# Altium PCB atWork_Power.PcbDoc
Units mm, origin at the board's own origin, x right, y up, seen from the top; angles counter-clockwise.
Board outline 233 x 88 mm, 2 copper layers (Top Layer, Bottom Layer); 115 components, 56 nets, 441 pads, 84 vias.
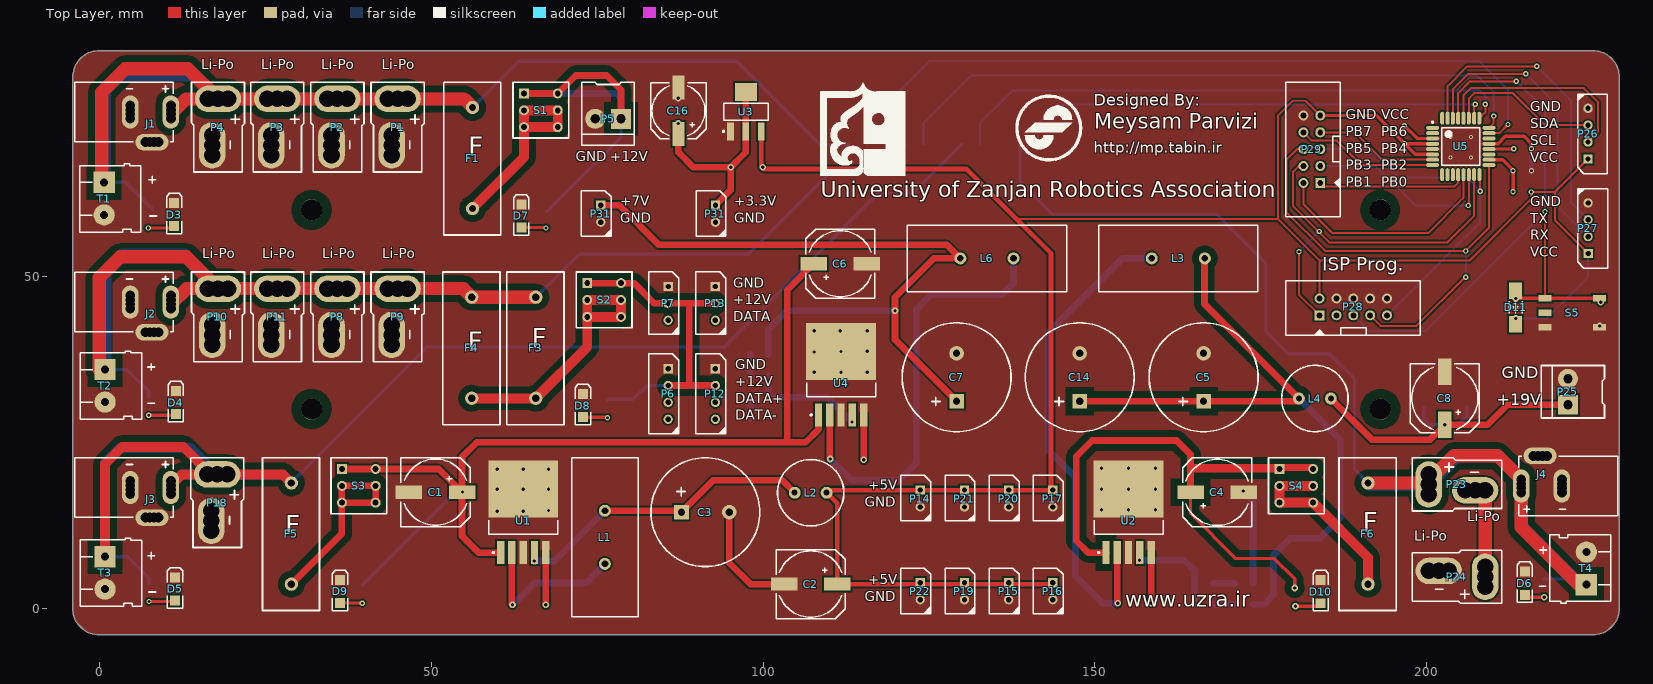
[diagram p0: Top Layer view]
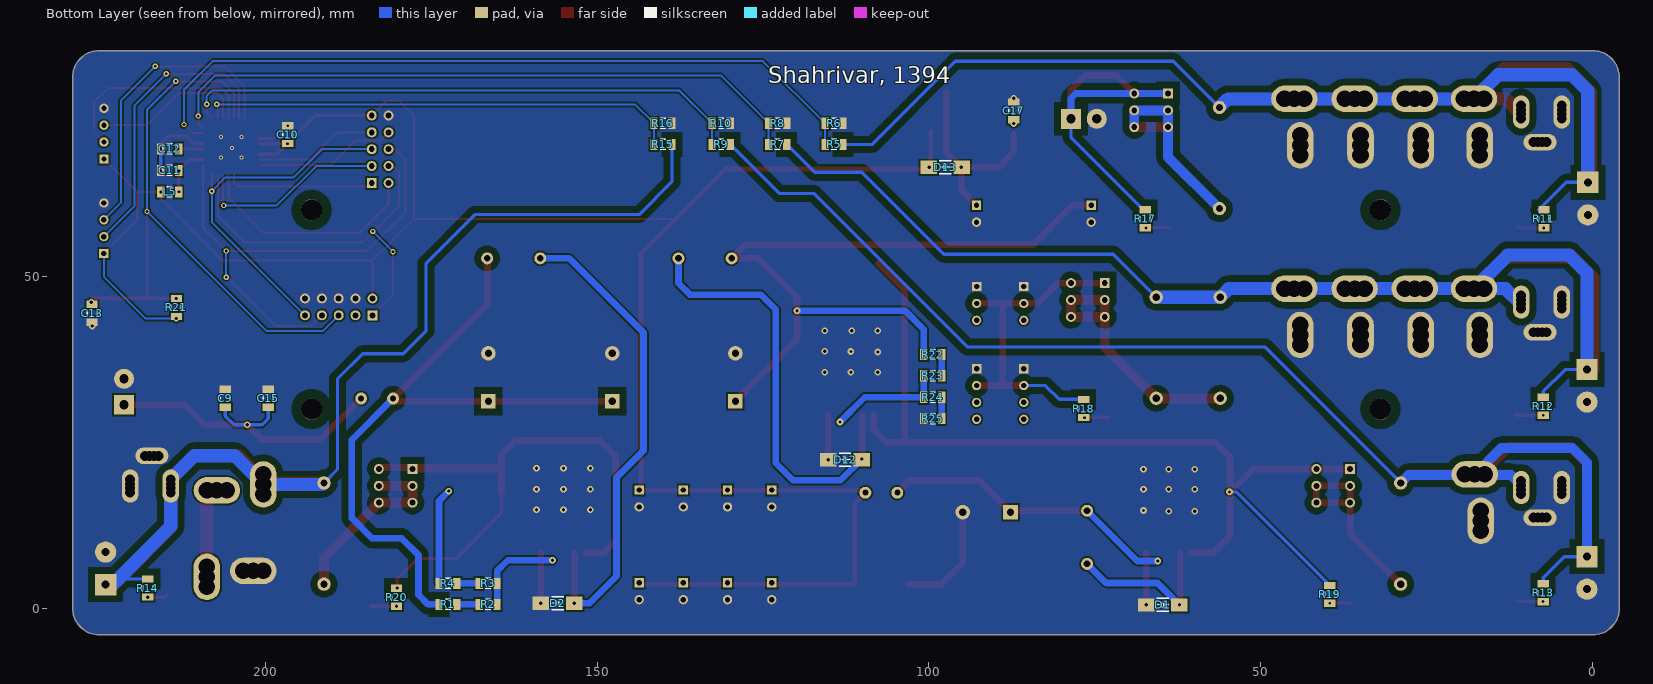
[diagram p1: Bottom Layer view, seen from below]

## Layer stack, top to bottom
Top Solder: solder mask 0.0102, Solder Resist, Dk 3.5
Top Layer: signal copper 0.0356
Dielectric 1: dielectric 0.32, FR-4, Dk 4.8
Bottom Layer: signal copper 0.0356
Bottom Solder: solder mask 0.0102, Solder Resist, Dk 3.5

## Board outline
-4,0 ccw(c0,0) 0,-4 225,-4 ccw(c225,0) 229,0 229,80 ccw(c225,80) 225,84 0.012,84 ccw(c0.012,80) -3.988,80 -4,80

## Design rules (kind name [scope] priority, off if disabled: settings)
Clearance Clearance_1 [InNet('BATT1') vs InNet('GND')] p1: gap=1
Clearance Clearance_2 [InNet('BATT2') vs InNet('GND')] p2: gap=1
Clearance Clearance_3 [InNet('BATT3') vs InNet('GND')] p3: gap=1
Clearance Clearance_4 [InNet('BATT_PC') vs InNet('GND')] p4: gap=1
Clearance Clearance_5 [InNet('MOTORS_POWER') vs InNet('GND')] p5: gap=1
Clearance Clearance_6 [InNet('DYNAMIXEL_POWER') vs InNet('GND')] p6: gap=1
Clearance Clearance_7 [InNet('PC_POWER') vs InNet('GND')] p7: gap=1
Clearance Clearance_8 [InNet('19V_PC') vs InNet('GND')] p8: gap=1
Clearance Clearance_9 [InNet('NetF1_2') vs InNet('GND')] p9: gap=1
Clearance Clearance_10 [InNet('NetF3_2') vs InNet('GND')] p10: gap=1
Clearance Clearance_12 [InNet('NetF5_2') vs InNet('GND')] p11: gap=1
Clearance Clearance_11 [InNet('NetF6_2') vs InNet('GND')] p12: gap=1
Clearance [All] p13: gap=0.254
PolygonConnect [All] p1: connectstyle=Direct reliefconductorwidth=0.254 reliefentries=4 polygonreliefangle="90 Angle" airgapwidth=0.254
RoutingVias [All] p1: holewidth=0.711 width=1.27 viastyle="Through Hole" minholewidth=0.711 minwidth=1.27 maxholewidth=0.711 maxwidth=1.27
SolderMaskExpansion [All] p1: expansion=0.102
Width [All] p1: maxlimit=2.54 minlimit=0.254 preferedwidth=0.4 minimp=50.000000 maximp=50.000000 favimp=50.000000
30 further rules are at their usual default settings.

## Classes and differential pairs
component class atWork_Power: C1 C2 C3 C4 C5 C6 C7 C8 C9 C14 C15 C16 C17 D1 D2 D12 D13 F1 F3 F4 F5 F6 J1 J2 J3 J4 L1 L2 L3 L4 L6 P1 P2 P3 P4 P5 P6 P7 P8 P9 P10 P11 P12 P13 P14 P15 P16 P17 P18 P19 P20 P21 P22 P23 P24 P25 P31 R1 R2 R3 R4 R22 R23 R24 R25 S1 S2 S3 S4 T1 T2 T3 T4 U1 U2 U4 U5
component class atWork_Power2: C10 C11 C12 C13 D3 D4 D5 D6 D7 D8 D9 D10 D11 L5 P26 P27 P28 P29 R5 R6 R7 R8 R9 R10 R11 R12 R13 R14 R15 R16 R17 R18 R19 R20 R21 S5 U5

## Components (designator, comment, footprint, x,y, rotation, side; value= is the part's Value field where it differs from the comment)
C1 "Cap Pol1" CAP-SMD2 50.661,17.478 r0 top
C2 "Cap Pol1" CAP-SMD2 107.176,3.638 r0 top
C3 "Cap Pol1" CAP2 91.313,14.478 r0 top
C4 "Cap Pol1" CAP-SMD2 168.402,17.478 r180 top
C5 "Cap Pol1" CAP2 166.37,34.798 r90 top
C6 "Cap Pol1" CAP-SMD2 111.633,51.915 r180 top
C7 "Cap Pol1" CAP2 129.159,34.798 r90 top
C8 "Cap Pol1" CAP-SMD2 202.692,31.623 r270 top
C9 "Cap" C1206 205.994,31.623 r270 bottom
C10 "Cap" C1206 196.608,71.35 r270 bottom
C11 "Cap" C1206 214.388,65.952 r180 bottom
C12 "Cap" C1206 214.388,69.191 r180 bottom
C13 "Cap" C1206 226.072,44.426 r90 bottom
C14 "Cap Pol1" CAP2 147.701,34.798 r90 top
C15 "Cap" C1206 199.517,31.623 r270 bottom
C16 "Cap Pol1" CAP-SMD1 87.249,74.93 r270 top
C17 "Cap" C1206 87.249,74.93 r270 bottom
D1 "1N5822" DIODE-SMD 64.77,0.508 r180 bottom
D2 "1N5822" DIODE-SMD 155.956,0.762 r180 bottom
D3 "LED2" 3.2X1.6X1.1 11.291,59.305 r90 top
D4 "LED2" 3.2X1.6X1.1 11.545,30.984 r90 top
D5 "LED2" 3.2X1.6X1.1 11.418,2.917 r90 top
D6 "LED2" 3.2X1.6X1.1 214.757,3.782 r90 top
D7 "LED2" 3.2X1.6X1.1 63.595,59.105 r90 top
D8 "LED2" 3.2X1.6X1.1 72.866,30.53 r90 top
D9 "LED2" 3.2X1.6X1.1 36.29,2.531 r90 top
D10 "LED2" 3.2X1.6X1.1 184.003,2.507 r90 top
D11 "Diode 1N4007" DIODE-SMD 213.372,45.315 r270 top
D12 "1N5822" DIODE-SMD 112.649,22.352 r180 bottom
D13 "Diode 1N4007" DIODE-SMD 97.536,66.421 r0 bottom
F1 "Fuse 1" FUSE 56.249,75.448 r270 top
F3 "Fuse 1" FUSE 65.774,46.873 r270 top
F4 "Fuse 1" FUSE 56.122,46.873 r270 top
F5 "Fuse 1" FUSE 28.944,18.874 r270 top
F6 "Fuse 1" FUSE 191.135,18.874 r270 top
J1 "PWR2.5" PWR2.5 -3.712,74.759 r0 top
J2 "PWR2.5" PWR2.5 -3.712,46.125 r0 top
J3 "PWR2.5" PWR2.5 -3.712,18.185 r0 top
J4 "PWR2.5" PWR2.5 228.727,18.415 r180 top
L1 "Inductor" IND2 76.188,10.685 r90 top
L2 "Inductor" IND1 107.176,17.404 r0 top
L3 "Inductor" IND2 162.56,52.705 r0 top
L4 "Inductor" IND1 183.134,31.598 r0 top
L5 "Inductor" C1206 214.388,62.714 r0 bottom
L6 "Inductor" IND2 133.731,52.705 r180 top
P1 "XT Power" XT 44.946,76.732 r270 top
P2 "XT Power" XT 35.886,76.732 r270 top
P3 "XT Power" XT 26.827,76.732 r270 top
P4 "XT Power" XT 17.895,76.732 r270 top
P5 "Motors Power" POWER2PIN 78.613,73.732 r180 top
P6 "Dynamixel 4 Pin Power" XH4PIN 85.713,36.092 r90 top
P7 "Dynamixel 3 Pin Power" XH3PIN 85.713,48.463 r90 top
P8 "XT Power" XT 35.886,48.157 r270 top
P9 "XT Power" XT 44.946,48.157 r270 top
P10 "XT Power" XT 17.895,48.157 r270 top
P11 "XT Power" XT 26.827,48.157 r270 top
P12 "Dynamixel 4 Pin Power" XH4PIN 92.825,36.092 r90 top
P13 "Dynamixel 3 Pin Power" XH3PIN 92.825,48.463 r90 top
P14 "Digital Power" XH2PIN 123.686,17.804 r90 top
P15 "Digital Power" XH2PIN 137.001,3.834 r90 top
P16 "Digital Power" XH2PIN 143.659,3.834 r90 top
P17 "Digital Power" XH2PIN 143.659,17.804 r90 top
P18 "XT Power" XT 17.768,20.158 r270 top
P19 "Digital Power" XH2PIN 130.343,3.834 r90 top
P20 "Digital Power" XH2PIN 137.001,17.804 r90 top
P21 "Digital Power" XH2PIN 130.343,17.804 r90 top
P22 "Digital Power" XH2PIN 123.686,3.834 r90 top
P23 "XT Power" XT 200.279,18.658 r0 top
P24 "XT Power" XT 208.779,4.734 r180 top
P25 "PC Power" POWER2PIN 221.253,30.66 r90 top
P26 "I2C" XH4PIN 224.282,67.691 r270 top
P27 "UART" XH4PIN 224.294,53.443 r270 top
P28 "Programmer" BOX2X5 188.923,44.137 r0 top
P29 "Box 5X2" BOX2X5 183.943,69.155 r90 top
P31 "3.3V Power" XH2PIN 92.837,60.706 r90 top
P31 "Encoder Power" XH2PIN 75.565,60.706 r90 top
R1 "Res1" C1206 172.466,0.577 r180 bottom
R2 "Res1" C1206 166.412,0.577 r180 bottom
R3 "Res1" C1206 166.412,3.741 r0 bottom
R4 "Res1" C1206 172.466,3.741 r180 bottom
R5 "Res1" C1206 114.288,69.874 r0 bottom
R6 "Res1" C1206 114.288,73.049 r180 bottom
R7 "Res1" C1206 122.797,69.874 r0 bottom
R8 "Res1" C1206 122.797,73.049 r180 bottom
R9 "Res1" C1206 131.306,69.874 r0 bottom
R10 "Res1" C1206 131.306,73.049 r180 bottom
R11 "Res1" C1206 7.366,58.674 r90 bottom
R12 "Res1" C1206 7.481,30.415 r90 bottom
R13 "Res1" C1206 7.481,2.348 r90 bottom
R14 "Res1" C1206 217.678,3.048 r90 bottom
R15 "Res1" C1206 140.069,69.874 r0 bottom
R16 "Res1" C1206 140.069,73.049 r180 bottom
R17 "Res1" C1206 67.425,58.663 r90 bottom
R18 "Res1" C1206 76.696,30.088 r90 bottom
R19 "Res1" C1206 39.612,2.089 r90 bottom
R20 "Res1" C1206 180.213,1.651 r90 bottom
R21 "Res1" C1206 213.372,45.315 r90 bottom
R22 "Res1" C1206 99.441,38.227 r180 bottom
R23 "Res1" C1206 99.441,35.01 r0 bottom
R24 "Res1" C1206 99.441,31.792 r180 bottom
R25 "Res1" C1206 99.441,28.575 r180 bottom
S1 "Switch 6 Pin" SW6PIN 63.996,77.556 r0 top
S2 "Switch 6 Pin" SW6PIN 73.521,48.981 r0 top
S3 "Switch 6 Pin" SW6PIN 36.564,20.982 r0 top
S4 "Switch 6 Pin" SW6PIN 177.8,20.982 r0 top
S5 "SW-PB" PUSH1 217.817,46.712 r0 top
T1 "Terminal 2" TERMINAL2PIN 0.75,64.159 r270 top
T2 "Terminal 2" TERMINAL2PIN 0.877,35.965 r270 top
T3 "Terminal 2" TERMINAL2PIN 0.877,7.771 r270 top
T4 "Terminal 2" TERMINAL2PIN 224.028,3.556 r90 top
U1 "LM2576S-5.0" TS5B_M 63.869,14.435 r90 top
U2 "LM2576S-ADJ" TS5B_M 155.067,14.435 r90 top
U3 "LM1117MP-3.3" MP04A_M 97.409,74.803 r90 top
U4 "LM2576S-ADJ" TS5B_M 111.76,35.179 r90 top
U5 "ATmega8A-AU" 32A_M 205.117,69.572 r0 top

## Footprints (in the part's own frame and the unit in brackets; to place one, negate y for a bottom-side part, rotate by r counter-clockwise, add the part's x,y. Pads: shape width x height; smd on the part's side, far side on the other; paste and mask are expansions set on the pad)
3.2X1.6X1.1 [mm] "SMT LED; 2 Flat Leads"
  rect 1.5x1.5 smd: 1(-1.75,0) 2(1.75,0)
  silkscreen extent -2.9,-1.15 3.2,1.15
32A_M [mm] "Thin QFP, 32-Leads, Body 7x7mm, Pitch 0.8mm, IPC Low Density"
  oval 1.95x0.6 smd: 1(-4.25,2.8) 2(-4.25,2) 3(-4.25,1.2) 4(-4.25,0.4) 5(-4.25,-0.4) 6(-4.25,-1.2) 7(-4.25,-2) 8(-4.25,-2.8) 17(4.25,-2.8) 18(4.25,-2) 19(4.25,-1.2) 20(4.25,-0.4) 21(4.25,0.4) 22(4.25,1.2) 23(4.25,2) 24(4.25,2.8)
  oval 0.6x1.95 smd: 9(-2.8,-4.25) 10(-2,-4.25) 11(-1.2,-4.25) 12(-0.4,-4.25) 13(0.4,-4.25) 14(1.2,-4.25) 15(2,-4.25) 16(2.8,-4.25) 25(2.8,4.25) 26(2,4.25) 27(1.2,4.25) 28(0.4,4.25) 29(-0.4,4.25) 30(-1.2,4.25) 31(-2,4.25) 32(-2.8,4.25)
  silkscreen extent -4.37,-2.85 2.85,3.77, body extent -3.5,-3.5 3.5,3.5, height 1.2
BOX2X5 [mm] "Box Header; 5x2 Position"
  rect 1.5x1.5 hole 0.9: 1(-5.08,0)
  round 1.5 hole 0.9: 2(-5.08,2.54) 3(-2.54,0) 4(-2.54,2.54) 5(0,0) 6(0,2.54) 7(2.54,0) 8(2.54,2.54) 9(5.08,0) 10(5.08,2.54)
  silkscreen extent -10.18,-3 10.12,5.2, body extent -10.18,-3 10.12,5.2, height 9
C1206 [mm] "Chip Capacitor, Body 3.2x1.6mm, IPC High Density"
  rect 1.1x1.7 smd: 1(-1.35,0) 2(1.35,0)
  silkscreen extent -0.4,-0.75 0.4,0.75, body extent -1.7,-0.9 1.7,0.9, height 1.3
CAP2 [mm] "1000uF, 50V, Electrolyte Capacitor; 2 Leads"
  rect 2.2x2.2 hole 1.1: 1(-3.6,0)
  round 2.2 hole 1.1: 2(3.6,0)
  silkscreen extent -8.2,-8.2 8.2,8.2
CAP-SMD1 [mm] "SMD Electrolyte Capacitor; 2 Leads; 100uF; 25V"
  rect 3.6x1.8 smd: 1(3.5,0) 2(-3.5,0)
  silkscreen extent -4.2,-4.2 4.2,4.2
CAP-SMD2 [mm] "SMD Electrolyte Capacitor; 2 Leads; 100uF; 50V"
  rect 4x2 smd: 1(4,0) 2(-4,0)
  silkscreen extent -5.2,-5.21 5.2,5.21
DIODE-SMD [mm] "1N5822; SS34 Schottkey Diode"
  rect 2.5x2 smd: 1(-2.5,0) 2(2.5,0)
  silkscreen extent -0.9,-0.99 0.9,0.99
FUSE [mm] "Fuse"
  round 2 hole 1.1: 1(0,0) 2(15.24,0)
  silkscreen extent -3.78,-4.36 19.22,4.24
IND1 [mm] "330uH 2A Inductor"
  round 1.8 hole 0.9: 1(-2.4,0) 2(2.4,0)
  silkscreen extent -5,-5 5,5
IND2 [mm] "100uH 5A Inductor"
  round 1.8 hole 1: 1(-4,0) 2(4,0)
  silkscreen extent -12,-5 12,5
MP04A_M [mm] "SOT223, 4-Leads, Body 6.5x3.5mm, Pitch 2.3mm, Lead Span 7mm, IPC Low Density"
  rect 2.7x1 smd: 1(-2.95,2.3) 2(-2.95,0) 3(-2.95,-2.3)
  rect 2.7x3.3 smd: 4(2.95,0)
  silkscreen extent -3.07,-3.35 1.3,3.47, body extent -1.85,-3.35 1.85,3.35, height 1.8
POWER2PIN [mm]
  rect 3x3 hole 1.4: 1(0,0)
  round 3 hole 1.4: 2(3.9,0)
  silkscreen extent -2,-5.5 5.9,4
PUSH1 [mm] "SMD Push Button; Arduino Uno Reset Button"
  rect 2x1 smd: 0(0,-2.2) 1(0,0) 1(8.2,0) 2(0,-4.4) 2(8.2,-4.4)
PWR2.5 [mm] "DC Power Jack, 2.5mm, KLD Series, PCB Mount"
  round 1.5 hole 1.5: 1(14.503,-1) 1(14.503,-0.33) 1(14.503,0.33) 1(14.503,1) 2(8.389,-1) 2(8.389,-0.33) 2(8.389,0.33) 2(8.389,1) 3(10.659,-4.547) 3(11.989,-4.547) 3(12.659,-4.547)
  oval 2.5x5 all layers, no hole: 1(14.503,0) 2(8.389,0)
  oval 1x1.5 hole 1.5: 3(11.328,-4.547)
  oval 5x2.5 all layers, no hole: 3(11.659,-4.547)
  silkscreen extent 0,-4.5 14.88,4.5
SW6PIN [mm] "On/Off Switch 6 Pin"
  rect 1.5x1.5 hole 0.9: 1(0,0)
  round 1.5 hole 0.9: 2(0,-2.54) 3(0,-5.08) 4(5.08,0) 5(5.08,-2.54) 6(5.08,-5.08)
  silkscreen extent -1.65,-6.72 6.75,1.68
TERMINAL2PIN [mm]
  rect 3.2x3.2 hole 1.2: 1(0,0)
  round 3.2 hole 1.2: 2(4.9,0)
  silkscreen extent -2.77,-3.7 7.5,5.5, body extent -2.5,-3.7 7.5,5.5, height 12.4
TS5B_M [mm] "D2-PAK, 6-Leads, Body 8.6x10.2mm, Pitch 1.7mm, Lead Span 14.1mm, IPC Low Density"
  rect 3.5x1.1 smd: 1(-6.05,3.4) 2(-6.05,1.7) 3(-6.05,0) 4(-6.05,-1.7) 5(-6.05,-3.4)
  rect 8.6x10.5 smd: 6(3.5,0)
  silkscreen extent -6.17,-5.2 -1.2,5.2, body extent -3.3,-5.2 6.1,5.2, height 4.65
XH2PIN [mm] "XH 2 Pin Connector"
  rect 1.4x1.4 hole 0.8: 1(0,0)
  round 1.4 hole 0.8: 2(-2.54,0)
  silkscreen extent -4.65,-1.57 2.22,2.93
XH3PIN [mm] "XH 3 Pin Connector"
  rect 1.4x1.4 hole 0.8: 1(0,0)
  round 1.4 hole 0.8: 2(-2.54,0) 3(-5.08,0)
  silkscreen extent -7.16,-1.57 2.22,2.93
XH4PIN [mm] "XH 4 Pin Connector"
  rect 1.4x1.4 hole 0.8: 1(0,0)
  round 1.4 hole 0.8: 2(-2.54,0) 3(-5.08,0) 4(-7.62,0)
  silkscreen extent -9.78,-1.57 2.22,2.93
XT [mm] "Li-Po Battery Connector; XT Power Connector"
  round 2.5 hole 2.5: 1(0,1.5) 1(0,0) 1(0,-1.5) 2(5.485,-0.89) 2(6.985,-0.89) 2(8.485,-0.89)
  oval 4x7 all layers, no hole: 1(0,0)
  oval 7x4 all layers, no hole: 2(6.985,-0.89)
  silkscreen extent -2.5,-4 11,4

## Part data
C1 C2 C3 C4 C5 C6 C7 C8 C14 C16: "Polarized Capacitor (Radial)"
C9 C10 C11 C12 C13 C15 C17: "Capacitor"
D1 D2 D12: library part Diode, "Default Diode"
D3 D4 D5 D6 D7 D8 D9 D10: "Typical RED, GREEN, YELLOW, AMBER GaAs LED"
D11 D13: "1 Amp General Purpose Rectifier"
F1 F3 F4 F5 F6: "Fuse"
J1 J2 J3 J4: "Low Voltage Power Supply Connector"
P1 P2 P3 P4 P5 P8 P9 P10 P11 P14 P15 P16 P17 P18 P19 P20 P21 P22 P23 P24 P25 P31 P31: library part "Header 2", "Header, 2-Pin"
P6 P12 P26 P27: library part "Header 4", "Header, 4-Pin"
P7 P13: library part "Header 3", "Header, 3-Pin"
P28: library part "Box 5X2", "Box, 5-Pin, Dual row"
P29: "Box, 5-Pin, Dual row"
R1 R2 R3 R4 R5 R6 R7 R8 R9 R10 R11 R12 R13 R14 R15 R16 R17 R18 R19 R20 R21 R22 R23 R24 R25: "Resistor"
S5: "Switch"
T1 T2 T3 T4: "Terminal, 2 pin"
U1 U2 U4: "SIMPLE SWITCHER® 3A Step-Down Voltage Regulator, 5-pin TO-263"
U3: "800mA Low-Dropout Linear Regulator, 4-pin SOT-223"
U5: "8-bit AVR Microcontroller, 8KB Flash, 512 Bytes EEPROM, 1KB SRAM, 32-pin TQFP, Industrial Grade (-40°C to 85°C)"

## Free pads (board coordinates)
  round 3.2 hole 3.2: 0(32,30) 0(32,60) 0(193,30) 0(193,60)

## Via types
v1: diameter 1, hole 0.5, Top Layer to Bottom Layer, 51 vias
v2: diameter 0.8, hole 0.4, Top Layer to Bottom Layer, 28 vias
v3: diameter 0.6, hole 0.3, Top Layer to Bottom Layer, 5 vias

## Nets (pads, with @x,y where several pads share a name; then routed paths per layer and width w, separated by ;. In a path a pad name is that pad's centre, name@x,y a point inside that pad or via, vN(x,y) a via of type N, cw(c..) or ccw(c..) an arc to the next point about the centre after c; other vN are vias at no path point)
3V3: C16.1 C17.2 D13.1 P31.1@92.837,60.706 U3.2 U3.4 | length 30.5
  Top Layer w1: C16.1 87.249,68.707 89.535,66.421 v1(95.123,66.421) ; P31.1@92.837,60.706 95.123,62.992 v1(95.123,66.421) ; U3.4 U3.2 97.409,68.707 v1(95.123,66.421)
  other v1: 87.249,73.025
5V: C2.1 C10.2 D11.2 D13.2 L2.2 L5.2 P14.1 P15.1 P16.1 P17.1 P19.1 P20.1 P21.1 P22.1 P26.1 P27.1 P28.2 P29.9 R21.1 U3.3 U5.4 U5.6 | length 348.4
  Top Layer w0.3: 138.176,58.674 177.546,58.674 ; P28.2 183.843,52.377 ; P29.9 181.724,76.454 179.832,76.454 177.546,74.168 177.546,58.674 ; P26.1 219.305,62.714 ; P27.1 219.305,58.432 219.305,62.714 ; 177.546,58.674 183.843,52.377 ; 183.843,52.377 206.428,52.377 215.738,61.687 v2(215.738,62.714) 219.305,62.714
  Top Layer w0.5: P29.9 192.374,74.235 v2(196.636,69.972) ; U5.6 198.236,68.372 v2(196.636,69.972) ; U5.4 v2(196.636,69.972)
  Top Layer w0.7: U3.3 99.709,66.661 v1(99.949,66.421) 100.203,66.167 130.683,66.167 138.176,58.674 143.383,53.467 143.383,18.08 P17.1 P20.1 P21.1 P14.1 109.976,17.804 L2.2 111.176,15.804 C2.1 143.463,3.638 P16.1
  Bottom Layer w0.3: v1(213.372,43.664) 218.035,43.664 224.294,49.923 P27.1
7V_ENCODER: C7.1 L6.2 P31.1@75.565,60.706 R22.1 | length 113.3
  Top Layer w1: P31.1@75.565,60.706 78.359,60.706 84.328,54.737 127.699,54.737 L6.2 125.73,52.705 119.888,46.863 v1(119.888,44.831) 119.888,40.469 C7.1
  Bottom Layer w1: R22.1 100.791,41.99 103.632,44.831 v1(119.888,44.831)
19V_PC: C5.1 C14.1 L3.2 L4.1 R1.1 | length 102.4
  Top Layer w1: C14.1 C5.1 L4.1@180.334,31.198 ; L3.2@166.497,52.832 166.497,45.835 L4.1
  Bottom Layer w1: R1.1 175.456,0.577 176.911,2.032 176.911,8.001 179.451,10.541 183.896,10.541 186.944,13.589 186.944,25.388 L4.1
ADC0: R5.2 R6.1 U5.23 | length 114.1
  Top Layer w0.3: U5.23 210.927,71.572 v2(212.229,72.874)
  Bottom Layer w0.3: R5.2 R6.1 125.012,82.423 207.899,82.423 212.229,78.093 v2(212.229,72.874)
ADC1: R7.2 R8.1 U5.24 | length 98.8
  Top Layer w0.3: U5.24 210.07,73.075 v2(210.07,74.144)
  Bottom Layer w0.3: R7.2 R8.1 131.362,80.264 207.518,80.264 210.07,77.712 v2(210.07,74.144)
ADC2: R9.2 R10.1 U5.25 | length 85.4
  Top Layer w0.3: U5.25 208.8,74.705 v2(208.8,75.922)
  Bottom Layer w0.3: R9.2 R10.1 137.585,77.978 208.026,77.978 208.8,77.204 v2(208.8,75.922)
ADC3: R15.2 R16.1 U5.26 | length 72.4
  Top Layer w0.3: U5.26 207.117,75.763 v2(207.276,75.922)
  Bottom Layer w0.3: R15.2 R16.1 144.291,75.922 v2(207.276,75.922)
BATT1: F1.1 J1.1 P1.1 P2.1 P3.1 P4.1 R5.1 R11.2 T1.1 | length 227.9
  Top Layer w2: T1.1@0.381,63.881 0.381,77.724 3.937,81.28 13.347,81.28 P4.1@17.895,76.732 ; J1.1@10.791,74.429 13.094,76.732 16.395,76.732 P4.1@17.895,76.732 ; F1.1 54.964,76.732 46.446,76.732 44.946,76.732 43.446,76.732 37.386,76.732 35.886,76.732 34.386,76.732 28.327,76.732 26.827,76.732 25.327,76.732 19.395,76.732 P4.1@17.895,76.732
  Bottom Layer w0.5: T1.1 3.993,64.159 R11.2@8.128,60.024 ; F1.1 63.224,82.423 96.012,82.423 108.561,69.874 R5.1
  Bottom Layer w2: T1.1 0.75,77.966 3.175,80.391 14.236,80.391 17.895,76.732 19.395,76.732 25.327,76.732 26.827,76.732 28.327,76.732 34.386,76.732 35.886,76.732 37.386,76.732 43.446,76.732 44.946,76.732 46.446,76.732 54.964,76.732 F1.1
BATT2: F3.1 F4.1 J2.1 P8.1 P9.1 P10.1 P11.1 R7.1 R12.2 T2.1 | length 256.8
  Top Layer w2: T2.1@-0.012,35.965 -0.012,49.772 3.175,52.959 13.093,52.959 P10.1@17.895,48.157 ; J2.1@10.791,45.795 13.153,48.157 16.395,48.157 P10.1@17.895,48.157 ; F3.1 F4.1 54.837,48.157 46.446,48.157 44.946,48.157 43.446,48.157 37.386,48.157 35.886,48.157 34.386,48.157 28.327,48.157 26.827,48.157 25.327,48.157 19.395,48.157 P10.1@17.895,48.157
  Bottom Layer w0.5: T2.1 4.17,35.965 7.431,32.704 ; R12.2 7.481,32.654 ; F3.1 72.241,53.34 97.79,53.34 110.109,65.659 117.232,65.659 R7.1
  Bottom Layer w2: T2.1 0.877,50.534 3.556,53.213 12.839,53.213 P10.1@17.895,48.157 ; J2.1@10.791,45.795 13.153,48.157 16.395,48.157 P10.1@17.895,48.157 ; F3.1 F4.1 54.837,48.157 46.446,48.157 44.946,48.157 43.446,48.157 37.386,48.157 35.886,48.157 34.386,48.157 28.327,48.157 26.827,48.157 25.327,48.157 19.395,48.157 P10.1@17.895,48.157
BATT3: F5.1 J3.1 P18.1 R9.1 R13.2 T3.1 | length 235.9
  Top Layer w1.5: T3.1 0.877,21.729 3.429,24.282 12.678,24.282 P18.1@16.801,20.158 ; J3.1@10.791,18.515 12.434,20.158 16.268,20.158 P18.1@16.801,20.158 ; F5.1 27.659,20.158 19.268,20.158 17.768,20.158 P18.1@16.801,20.158
  Bottom Layer w0.5: T3.1 4.297,7.771 7.481,4.587 R13.2 ; F5.1 49.44,39.37 94.234,39.37 117.348,62.484 122.566,62.484 R9.1
  Bottom Layer w1.5: T3.1 0.877,21.959 3.048,24.13 13.796,24.13 P18.1@17.768,20.158 ; J3.1@10.791,18.515 12.342,20.066 27.751,20.066 F5.1
BATT_PC: F6.1 J4.1 P23.1 R14.2 R15.1 T4.1 | length 190.9
  Top Layer w2: F6.1 200.064,18.874 P23.1@200.279,18.658 ; P23.1@200.279,20.158 201.26,20.158 204.089,22.987 210.652,22.987 214.224,19.415 214.224,18.745 214.224,18.415 214.224,18.085 214.224,17.415 214.224,12.217 222.885,3.556 T4.1
  Bottom Layer w0.5: R15.1 138.719,64.227 143.637,59.309 168.402,59.309 175.768,51.943 175.768,41.783 179.197,38.354 185.293,38.354 189.103,34.544 189.103,20.906 F6.1 ; R14.2 222.17,4.398 223.186,4.398 T4.1
  Bottom Layer w2: F6.1 191.35,18.658 200.279,18.658 204.608,22.987 210.652,22.987 214.224,19.415 214.224,18.745 214.224,18.415 214.224,18.085 214.224,17.415 214.224,12.344 222.17,4.398 223.012,3.556 T4.1
DIGI_SW: C1.1 C6.1 R19.2 S3.1 S3.4 U1.1 U4.1 | length 145.4
  Top Layer w1: S3.1 S3.4 51.157,20.982 C1.1 ; U1.1 57.147,8.385 54.661,10.871 C1.1 ; C6.1 103.632,47.914 103.632,25.019 ; U4.1 108.36,26.953 106.426,25.019 103.632,25.019 ; C1.1 54.661,22.784 56.896,25.019 103.632,25.019
  Bottom Layer w0.5: R19.2 53.698,17.526 v1(54.737,17.526)
DYNAMIXEL_POWER: P6.2 P7.2 P12.2 P13.2 R18.2 S2.1 S2.4 | length 49.7
  Top Layer w1: S2.1 S2.4 80.559,48.981 83.617,45.923 P7.2 P13.2 ; P6.2 88.9,33.552 88.9,45.796 ; 89.154,33.552 P12.2
  Bottom Layer w0.5: R18.2@76.581,31.311 76.766,31.496 80.391,31.496 82.447,33.552 P6.2
GND: C1.2 C2.2 C3.2 C4.2 C5.2 C6.2 C7.2 C8.2 C9.1 C10.1 C11.1 C12.1 C13.1 C14.2 C15.1 C16.2 C17.1 D1.1 D2.1 D3.2 D4.2 D5.2 D6.2 D7.2 D8.2 D9.2 D10.2 D12.1 J1.2 J1.3 J2.2 J2.3 J3.2 J3.3 J4.2 J4.3 P1.2 P2.2 P3.2 P4.2 P5.2 P6.1 P7.1 P8.2 P9.2 P10.2 P11.2 P12.1 P13.1 P14.2 P15.2 P16.2 P17.2 P18.2 P19.2 P20.2 P21.2 P22.2 P24.2 P25.2 P26.4 P27.4 P28.4 P28.6 P28.8 P28.10 P29.10 P31.2 R4.1 R6.2 R8.2 R10.2 R16.2 R25.1 S5.2 T1.2 T2.2 T3.2 T4.2 U1.3 U1.5 U1.6 U2.3 U2.5 U2.6 U3.1 U4.3 U4.5 U4.6 U5.3 U5.5 U5.21 | length 78.3
  Top Layer w0.5: U1.5 U1.5 67.27,0.548 v1(67.27,0.508) ; v2(196.608,72.7) 198.536,70.772 U5.3 ; U5.21 210.724,69.972 211.848,71.096 214.642,71.096 215.738,70 v2@215.738,69.191
  Top Layer w1: U1.5 67.269,0.549 67.27,0.548 v1@67.31,0.508 ; C3.2 94.913,6.814 98.089,3.638 C2.2 ; U4.5 115.16,22.381 v1(115.189,22.352) ; v1@158.467,0.791 U2.5
  Bottom Layer w0.5: C11.1 C12.1
  Bottom Layer w1: v1(172.339,17.653) 173.816,16.176 R4.1
  other v1: 158.496,0.762 59.944,14.605 63.881,14.605 67.691,14.732 151.003,14.859 155.067,14.859 159.131,14.859 59.944,17.907 67.691,17.907 151.003,17.907 159.131,17.907 63.869,17.935 155.067,17.935 59.944,20.955 63.881,20.955 67.691,20.955 151.003,21.082 155.067,21.082 159.131,21.082 107.696,35.56 111.76,35.56 115.697,35.56 107.696,38.608 111.76,38.679 115.697,38.735 107.696,41.783 111.633,41.783 115.697,41.783 226.072,42.521 87.249,76.835
  other v2: 215.773,65.913 215.773,69.215
  other v3: 203.593,67.921 206.641,67.921 204.99,69.318 203.593,70.969 206.641,70.969
MISO: P28.9 P29.5 U5.16 | length 53.6
  Top Layer w0.3: v2@208.044,62.962 U5.16@208.044,65.322
  Bottom Layer w0.3: P29.5 191.438,69.155 195.695,64.897 205.982,64.897 v2(208.038,62.841) 208.038,58.172 P28.9
MOSI: P28.1 P29.4 U5.15 | length 59.7
  Top Layer w0.3: v2(180.733,53.697) 180.733,47.247 P28.1 ; P29.4 180.697,66.615 179.844,65.762 179.844,60.567 185.293,55.118 203.109,55.118 207.117,59.126 U5.15
  Bottom Layer w0.3: v2(180.733,53.697) v2(183.805,56.769)
MOTORS_POWER: P5.1 R17.2 S1.1 S1.4 | length 57.6
  Top Layer w1: S1.1 S1.4 71.784,80.264 76.454,80.264 78.613,78.105 P5.1
  Bottom Layer w0.5: R17.2@67.425,59.759 78.613,70.947 P5.1
  Bottom Layer w1: S1.1 S1.4 77.892,77.556 78.613,76.835 P5.1
NetC3_1: C3.1 L1.2 L2.1 U1.4 | length 45.3
  Top Layer w1: L1.2 87.506,14.685 C3.1 92.539,19.304 102.876,19.304 L2.1
  Bottom Layer w1: v1(65.532,7.112) 68.615,7.112 L1.2
NetC8_1: C8.1 C9.2 C15.2 L4.2 P25.1 | length 50.9
  Top Layer w1: L4.2 191.732,25.4 200.469,25.4 v1(202.692,27.623) 209.106,27.623 212.143,30.66 P25.1
  Bottom Layer w0.5: C15.2 199.517,28.575 200.469,27.623 v1(202.692,27.623) 204.661,27.623 205.994,28.956 C9.2
NetC11_2: C11.2 L5.1 U5.18 | length 7.6
  Top Layer w0.5: U5.18 211.419,67.572 213.038,65.952 v2@213.038,62.714
  other v2: 212.979,62.738 212.979,65.913
NetC12_2: C12.2 U5.20 | length 3.7
  Top Layer w0.5: U5.20 213.019,69.172 v2@213.038,69.191
  other v2: 213.106,69.215
NetD1_2: D1.2 L1.1 U1.2 | length 24.4
  Top Layer w1: U1.2 62.169,0.609 v1(62.27,0.508)
  Bottom Layer w1: v1(62.27,0.508) 65.572,3.81 73.313,3.81 L1.1
NetD2_2: D2.2 L3.1 U2.2 | length 74.2
  Top Layer w1: v1@153.367,0.811 U2.2
  Bottom Layer w1: v1(153.416,0.762) 151.13,0.762 147.066,4.826 147.066,19.685 143.002,23.749 143.002,41.529 154.178,52.705 L3.1@158.623,52.705
NetD3_1: D3.1 R11.1 | length 4
  Top Layer w0.5: v2(7.366,57.277) 11.013,57.277 D3.1
NetD4_1: D4.1 R12.1 | length 4.1
  Top Layer w0.5: v2(7.481,29.065) 11.376,29.065 D4.1
NetD5_1: D5.1 R13.1 | length 4
  Top Layer w0.5: v2(7.493,1.016) 11.267,1.016 D5.1
NetD6_1: D6.1 R14.1 | length 3.1
  Top Layer w0.5: D6.1 215.138,1.651 v1(217.678,1.651)
NetD7_1: D7.1 R17.1 | length 3.7
  Top Layer w0.3: v2@67.232,57.355 v2(67.31,57.277)
  Top Layer w0.5: D7.1 v2@67.232,57.355
NetD8_1: D8.1 R18.1 | length 3.6
  Top Layer w0.5: D8.1 v2@76.503,28.78
  other v2: 76.581,28.702
NetD9_1: D9.1 R19.1 | length 3.3
  Top Layer w0.5: D9.1 v2@39.624,0.781
  other v2: 39.624,0.762
NetD10_1: D10.1 R20.1 | length 3.9
  Top Layer w0.5: v1(180.213,0.301) D10.1@184.15,0.301
NetD12_2: D12.2 L6.1 U4.2 | length 65.2
  Top Layer w1: U4.2 110.06,22.528 v1(110.109,22.479)
  Bottom Layer w1: v1(110.109,22.479) 113.284,19.304 120.523,19.304 123.063,21.844 123.063,44.958 125.349,47.244 136.017,47.244 137.731,48.958 L6.1
NetF1_2: F1.2 S1.2 S1.3 S1.5 S1.6 | length 56.4
  Top Layer w1.5: F1.2 63.996,67.955 S1.3 ; S1.3 S1.2 S1.5 S1.6 S1.3
  Bottom Layer w1.5: F1.2 63.996,67.955 S1.3 S1.2 S1.5 S1.6
NetF3_2: F3.2 F4.2 S2.2 S2.3 S2.5 S2.6 | length 40.4
  Top Layer w1.5: F4.2 F3.2 73.521,39.38 S2.3 ; S2.3 S2.2 S2.5 S2.6 S2.3
NetF5_2: F5.2 S3.2 S3.3 S3.5 S3.6 | length 30.7
  Top Layer w1: F5.2 36.564,11.254 S3.3 ; S3.3 S3.2 S3.5 S3.6 S3.3
NetF6_2: F6.2 S4.2 S4.3 S4.5 S4.6 | length 28.4
  Top Layer w1.5: S4.5 S4.2 S4.3 S4.6 191.135,7.647 F6.2
NetP23_2: P23.2 P24.1 | length 13.7
  Top Layer w2: P23.2@207.264,17.768 208.779,16.253 208.779,6.234 P24.1@208.779,4.734
NetR1_2: R1.2 R2.1 | length 3.4
  Bottom Layer w1: R2.1 R1.2
NetR2_2: R2.2 R3.1 U2.4 | length 14.1
  Bottom Layer w1: v1(156.718,7.239) 163.449,7.239 165.062,5.626 R3.1 R2.2
NetR3_2: R3.2 R4.2 | length 3.4
  Bottom Layer w1: R3.2 R4.2
NetR22_2: R22.2 R23.1 | length 3.2
  Bottom Layer w1: R23.1 R22.2
NetR23_2: R23.2 R24.1 U4.4 | length 17.4
  Bottom Layer w1: R23.2 R24.1 109.686,31.792 v1(113.411,28.067)
NetR24_2: R24.2 R25.2 | length 3.2
  Bottom Layer w1: R25.2 R24.2
PB0: P29.1 U5.12 | length 22.5
  Top Layer w0.3: P29.1 184.518,63.5 204.089,63.5 204.717,64.128 U5.12
PB1: P29.2 U5.13 | length 34.8
  Top Layer w0.3: P29.2 181.403,60.901 185.789,56.515 200.188,56.515 205.517,61.844 U5.13
PB2: P29.3 U5.14 | length 29.4
  Top Layer w0.3: v2@206.317,60.739 U5.14
  Bottom Layer w0.3: P29.3 192.327,66.615 198.259,60.682 v2(206.26,60.682)
PB6: P29.7 U5.7 | length 18.6
  Top Layer w0.3: P29.7 189.152,71.695 193.274,67.572 U5.7
PB7: P29.8 U5.8 | length 21.5
  Top Layer w0.3: P29.8 182.637,70.461 186.448,70.461 190.137,66.772 U5.8
PC_POWER: C4.1 R20.2 S4.1 S4.4 U2.1 | length 98.8
  Top Layer w0.5: C4.1 164.402,14.287 171.196,7.493 177.038,7.493 180.086,4.445 v1(180.086,3.048)
  Top Layer w1: U2.1 148.968,8.385 147.193,10.16 147.193,22.86 149.606,25.273 162.306,25.273 164.402,23.177 164.402,21.209 ; C4.1 164.402,21.209 ; S4.1 164.629,20.982 164.402,21.209 ; S4.4@182.653,21.209 164.402,21.209
RESET: C13.2 D11.1 P28.5 R21.2 S5.1 U5.29 | length 97.7
  Top Layer w0.3: U5.29 204.717,77.59 206.502,79.375 v2(213.487,79.375) ; S5.1@217.805,46.724 v2(217.805,59.781)
  Top Layer w0.5: v1(213.372,46.665) 213.419,46.712 217.817,46.712 S5.1@226.017,46.712
  Bottom Layer w0.3: P28.5 191.301,41.759 199.783,41.759 v2(217.805,59.781) 217.805,75.057 v2(213.487,79.375)
  other v1: 226.199,46.077
RX: P27.2 U5.30 | length 44.9
  Top Layer w0.3: U5.30@203.821,73.918 U5.30 203.917,78.187 206.248,80.518 v2(214.884,80.518)
  Bottom Layer w0.3: v2(214.884,80.518) 219.71,75.692 219.71,60.567 P27.2
SCK: P28.7 P29.6 U5.17 | length 77
  Top Layer w0.3: P29.6 180.443,69.155 178.828,67.54 178.828,59.678 184.682,53.824 v2(205.879,53.824) 209.367,57.312 U5.17 ; P28.7 193.052,42.548 198.413,42.548 205.752,49.887 v2(205.879,49.887)
  Bottom Layer w0.3: v2(205.879,49.887) v2(205.879,53.824)
SCL: P26.2 U5.28 | length 31.7
  Top Layer w0.3: U5.28 205.517,77.247 206.629,78.359 223.647,78.359 225.806,76.2 225.806,71.755 P26.2
SDA: P26.3 U5.27 | length 23.3
  Top Layer w0.3: U5.27 206.317,76.777 207.137,77.597 212.979,77.597 217.805,72.771 P26.3
TX: P27.3 U5.31 | length 45.8
  Top Layer w0.3: U5.31 203.117,78.657 206.097,81.637 v2(216.559,81.637)
  Bottom Layer w0.3: v2(216.559,81.637) 221.742,76.454 221.742,61.075 P27.3
pads on no net: P6.3 P6.4 P7.3 P12.3 P12.4 P13.3 P28.3 S5.0 U5.1 U5.2 U5.9 U5.10 U5.11 U5.19 U5.22 U5.32

## Polygon pours and split planes (outlines as drawn)
GND on Top Layer "Mechanical 1-No Net" (solid, pour order 2): -4,0 ccw(c0,0) 0,-4 225,-4 ccw(c225,0) 229,0 229,80 ccw(c225,80) 225,84 0.012,84 ccw(c0.012,80) -3.988,80 -4,80
GND on Bottom Layer "Mechanical 1-No Net" (solid, pour order 4): -4,0 ccw(c0,0) 0,-4 225,-4 ccw(c225,0) 229,0 229,80 ccw(c225,80) 225,84 0.012,84 ccw(c0.012,80) -3.988,80 -4,80

## Other copper
Top Layer:
  pour cut-out: 189.991,60 cw(c193,60) 193,63.009 cw(c193,60) 196.009,60 cw(c193,60) 193,56.991 cw(c193,60)
  pour cut-out: 193,33.009 cw(c193,30) 196.009,30 cw(c193,30) 193,26.991 cw(c193,30) 189.991,30 cw(c193,30)
  pour cut-out: 32,56.991 cw(c32,60) 28.991,60 cw(c32,60) 32,63.009 cw(c32,60) 35.009,60 cw(c32,60)
  pour cut-out: 35.009,30 cw(c32,30) 32,26.991 cw(c32,30) 28.991,30 cw(c32,30) 32,33.009 cw(c32,30)
Bottom Layer:
  pour cut-out: 189.991,60 cw(c193,60) 193,63.009 cw(c193,60) 196.009,60 cw(c193,60) 193,56.991 cw(c193,60)
  pour cut-out: 193,33.009 cw(c193,30) 196.009,30 cw(c193,30) 193,26.991 cw(c193,30) 189.991,30 cw(c193,30)
  pour cut-out: 32,56.991 cw(c32,60) 28.991,60 cw(c32,60) 32,63.009 cw(c32,60) 35.009,60 cw(c32,60)
  pour cut-out: 35.009,30 cw(c32,30) 32,26.991 cw(c32,30) 28.991,30 cw(c32,30) 32,33.009 cw(c32,30)

## Silkscreen, mask and mechanical layers (free items; w line width, h text height)
Top Overlay:
  drawing of 2374 lines, arcs and shapes, not listed
  text "Li-Po" at 15.367,80.645 h2.5
  text "Li-Po" at 24.426,80.645 h2.5
  text "Li-Po" at 33.486,80.645 h2.5
  text "Li-Po" at 42.545,80.645 h2.5
  text "Designed By:" at 149.808,75.122 h3
  text "GND" at 215.56,74.319 h2.5
  text "GND" at 187.792,73.128 h2.5
  text "VCC" at 193.126,73.128 h2.5
  text "SDA" at 215.56,71.779 h2.5
  text "Meysam Parvizi" at 149.908,71.439 h4
  text "PB7" at 187.792,70.588 h2.5
  text "PB6" at 193.126,70.588 h2.5
  text "SCL" at 215.56,69.239 h2.5
  text "PB5" at 187.792,68.048 h2.5
  text "PB4" at 193.126,68.048 h2.5
  text "http://mp.tabin.ir" at 149.808,68.01 h2.8
  text "F" at 55.614,67.08 h5
  text "GND" at 71.755,66.802 h2.5
  text "+12V" at 76.962,66.802 h2.5
  text "VCC" at 215.56,66.699 h2.5
  text "PB3" at 187.792,65.508 h2.5
  text "PB2" at 193.126,65.508 h2.5
  text "PB1" at 187.792,62.968 h2.5
  text "PB0" at 193.126,62.968 h2.5
  text "University of Zanjan Robotics Association" at 108.712,61.087 h4.1
  text "+7V" at 78.527,60.095 h2.5
  text "+3.3V" at 95.672,60.095 h2.5
  text "GND" at 215.605,60.047 h2.5
  text "GND" at 78.527,57.555 h2.5
  text "GND" at 95.672,57.555 h2.5
  text "TX" at 215.605,57.507 h2.5
  text "RX" at 215.605,54.967 h2.5
  text "VCC" at 215.605,52.427 h2.5
  text "Li-Po" at 15.494,52.197 h2.5
  text "Li-Po" at 24.553,52.197 h2.5
  text "Li-Po" at 33.613,52.197 h2.5
  text "Li-Po" at 42.672,52.197 h2.5
  text "ISP Prog." at 184.277,50.165 h3.5
  text "GND" at 95.545,47.776 h2.5
  text "+12V" at 95.545,45.236 h2.5
  text "DATA" at 95.545,42.696 h2.5
  text "F" at 65.139,38.251 h5
  text "F" at 55.487,37.743 h5
  text "GND" at 95.799,35.457 h2.5
  text "GND" at 211.316,34.036 h3
  text "+12V" at 95.799,32.917 h2.5
  text "DATA+" at 95.799,30.377 h2.5
  text "+19V" at 210.566,29.972 h3
  text "DATA-" at 95.799,27.837 h2.5
  text "+5V" at 115.86,17.296 h2.5
  text "GND" at 115.304,14.756 h2.5
  text "Li-Po" at 206.121,12.573 h2.5
  text "F" at 190.373,10.541 h5
  text "F" at 28.055,10.057 h5
  text "Li-Po" at 198.12,9.652 h2.5
  text "+5V" at 115.86,3.072 h2.5
  text "GND" at 115.304,0.532 h2.5
  text "www.uzra.ir" at 154.559,-0.635 h4
Bottom Overlay:
  text "Shahrivar, 1394" at 124.206,78.232 h4.2
Mechanical 1:
  lines w0.254: -4,80 -4,0 ccw(c0,0) 0,-4 225,-4 ccw(c225,0) 229,0 229,80 ccw(c225,80) 225,84 0.012,84 ccw(c0.012,80) -3.988,80